# Altium PCB Lightproject.PcbDoc
Units mil, origin at the board's own origin, x right, y up, seen from the top; angles counter-clockwise.
Board outline 6000 x 4000 mil, 2 copper layers (Top Layer, Bottom Layer); 14 components, 6 nets, 54 pads, 0 vias.
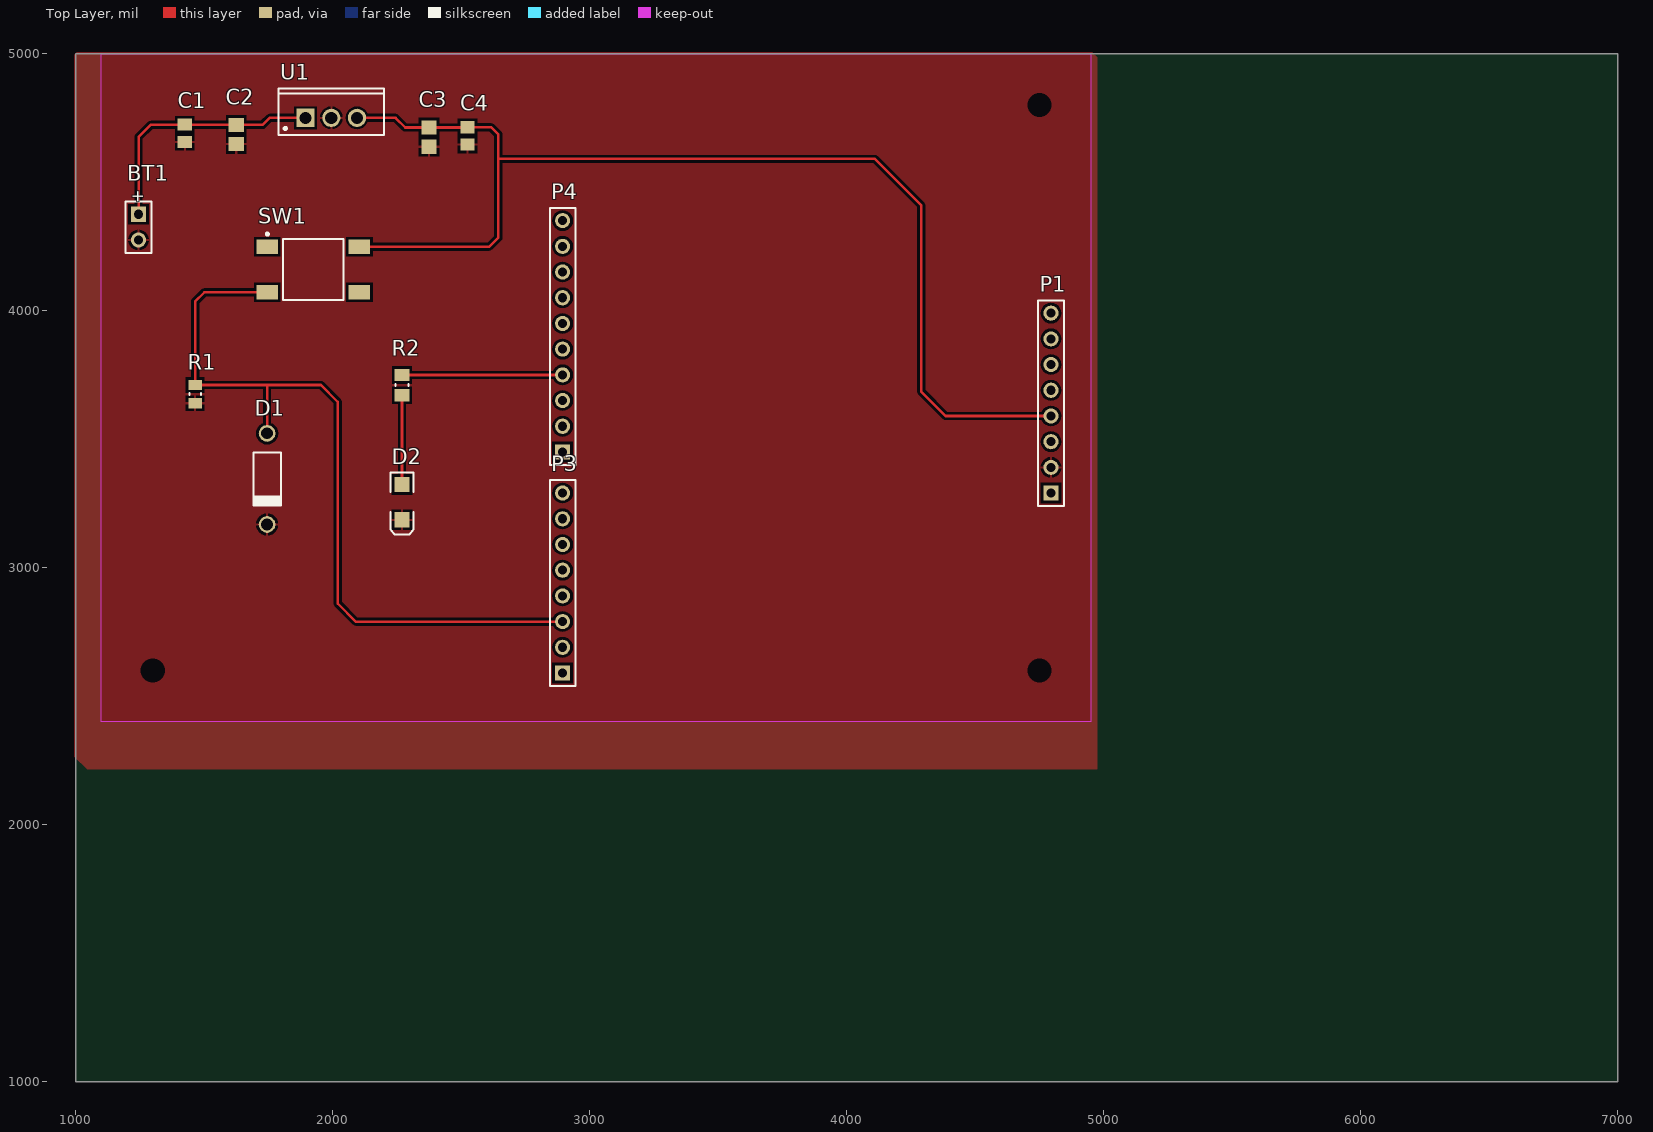
[diagram p0: Top Layer view]
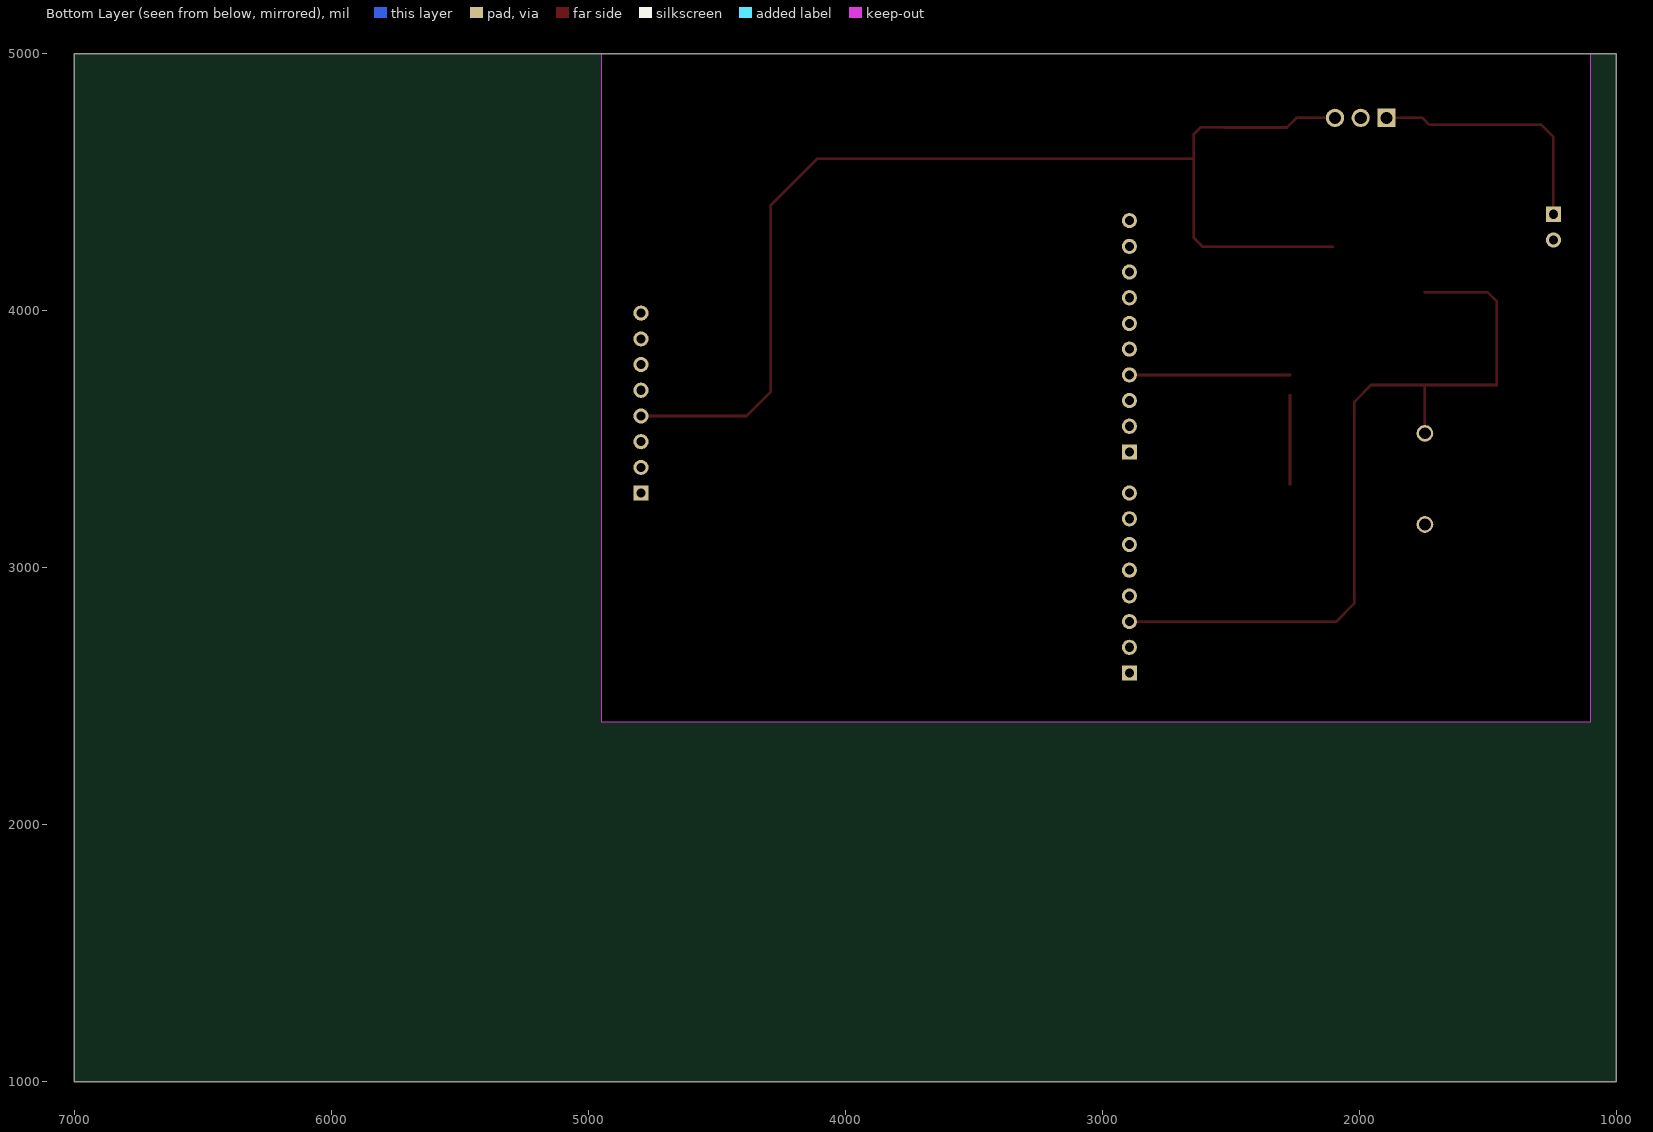
[diagram p1: Bottom Layer view, seen from below]

## Layer stack, top to bottom
Top Solder: solder mask 0.4, Solder Resist, Dk 3.5
Top Layer: signal copper 1.4
Dielectric 1: dielectric 12.6, FR-4, Dk 4.8
Bottom Layer: signal copper 1.4
Bottom Solder: solder mask 0.4, Solder Resist, Dk 3.5

## Board outline
1000,1000 7000,1000 7000,5000 1000,5000
cut-out: 1100,5000 4950,5000 4950,2400 1100,2400
cut-out: 1025,8130

## Design rules (kind name [scope] priority, off if disabled: settings)
Clearance [All] p1: gap=10 ignorepadtopadclearanceinfootprint=FALSE except(0: Arc-Hole Track-Hole SMDPad-Hole THPad-Hole Via-Hole Fill-Hole Poly-Hole Region-Hole Text-Hole)
PolygonConnect [All] p1: connectstyle=Relief reliefconductorwidth=10 reliefentries=4 polygonreliefangle="90 Angle" airgapwidth=10
RoomDefinition Lightproject [InComponentClass('Lightproject')] p1: confinementstyle=ConfineIn formatcopy=TRUE lockcomponents=FALSE outline 8480,1500 11435,1500 11435,2620 8480,2620
RoutingVias [All] p1: holewidth=28 width=50 viastyle="Through Hole" minholewidth=28 minwidth=50 maxholewidth=28 maxwidth=50
SolderMaskExpansion [All] p1: expansion=4
Width [All] p1: maxlimit=10 minlimit=10 preferedwidth=10
30 further rules are at their usual default settings.

## Classes and differential pairs
component class Lightproject: BT1 C1 C2 C3 C4 D1 D2 P1 P3 P4 R1 R2 SW1

## Components (designator, comment, footprint, x,y, rotation, side; value= is the part's Value field where it differs from the comment)
BT1 "Battery" BAT-2 1245,4325 r270 top
C1 "GRM21BR71A105KA01L" CAPC2013X135X45NL10T25 1425,4690 r90 top
C2 "GRM21BR71E104KA01L" CAPC2013X135X50ML10T20 1625,4685 r90 top
C3 "GRM21BR71E104KA01L" CAPC2013X135X50ML10T20 2375,4675 r90 top
C4 "GRM21BR71A105KA01L" CAPC2013X135X45NL10T25 2525,4680 r90 top
D1 "1N4730A" FAIR-DO-41-2_V 1745,3345 r270 top
D2 "LED2" 3.2X1.6X1.1 2270,3255 r270 top
P1 "Header 8" HDR1X8 4795,3290 r90 top
P3 "Header 8" HDR1X8 2895,2590 r90 top
P4 "Header 10" HDR1X10 2895,3450 r90 top
R1 "RC0805JR-07130KL" RESC2013X60X35NL10T20 1465,3675 r90 top
R2 "RC0805JR-07200RL" RESC2013X60X35ML10T20 2270,3710 r90 top
SW1 "FSM6JSMA" TECO-FSM6JSMA_V 1925,4160 r90 top
U1 "L7805CP" TO220FP 1995,4750 r0 top

## Footprints (in the part's own frame and the unit in brackets; to place one, negate y for a bottom-side part, rotate by r counter-clockwise, add the part's x,y. Pads: shape width x height; smd on the part's side, far side on the other; paste and mask are expansions set on the pad)
3.2X1.6X1.1 [mm] "SMT LED; 2 Flat Leads"
  rect 1.5x1.5 smd: 1(-1.75,0) 2(1.75,0)
  silkscreen extent -2.9,-1.15 3.2,1.15
BAT-2 [mm] "Battery; 2 Leads"
  rect 1.5x1.5 hole 0.9: 1(-1.27,0)
  round 1.5 hole 0.9: 2(1.27,0)
  silkscreen extent -2.54,-1.27 2.54,1.27
CAPC2013X135X45NL10T25 [mm] "Chip Capacitor, 2-Leads, Body 2.00x1.25mm, IPC Medium Density"
  rect 1.2x1.4 smd: 1(-0.85,0) 2(0.85,0)
  body extent -1.05,-0.67 1.05,0.67, height 1.35
CAPC2013X135X50ML10T20 [mm] "Chip Capacitor, 2-Leads, Body 2.00x1.25mm, IPC Low Density"
  rect 1.4x1.5 smd: 1(-0.95,0) 2(0.95,0)
  body extent -1.05,-0.67 1.05,0.67, height 1.35
FAIR-DO-41-2_V [mm] "2-Leads, Axial leaded, Body 2.72x5.2mm, Pin Spacing 9mm"
  round 1.65 hole 1.15: 1(-4.5,0) 2(4.5,0)
  silkscreen extent -2.6,-1.36 2.6,1.36, body extent -4.93,-1.36 4.93,1.36, height 2.71
HDR1X8 [mm] "Connector; Header; 8 Position"
  rect 1.5x1.5 hole 0.9: 1(0,0)
  round 1.5 hole 0.9: 2(2.54,0) 3(5.08,0) 4(7.62,0) 5(10.16,0) 6(12.7,0) 7(15.24,0) 8(17.78,0)
  silkscreen extent -1.27,-1.27 19.05,1.27
HDR1X10 [mm] "Connector; Header; 10 Position"
  rect 1.5x1.5 hole 0.9: 1(0,0)
  round 1.5 hole 0.9: 2(2.54,0) 3(5.08,0) 4(7.62,0) 5(10.16,0) 6(12.7,0) 7(15.24,0) 8(17.78,0) 9(20.32,0) 10(22.86,0)
  silkscreen extent -1.27,-1.27 24.13,1.27
RESC2013X60X35ML10T20 [mm] "Chip Resistor, 2-Leads, Body 2.00x1.25mm, IPC Low Density"
  rect 1.2x1.45 smd: 1(-1,0) 2(1,0)
  silkscreen extent -0.1,-0.63 0.1,0.63, body extent -1.05,-0.67 1.05,0.67, height 0.6
RESC2013X60X35NL10T20 [mm] "Chip Resistor, 2-Leads, Body 2.00x1.25mm, IPC Medium Density"
  rect 1x1.35 smd: 1(-0.9,0) 2(0.9,0)
  silkscreen extent -0.1,-0.58 0.1,0.58, body extent -1.05,-0.67 1.05,0.67, height 0.6
TECO-FSM6JSMA_V [mm] "SMD, 4-Leads, Body 6x6mm, Pitch 4.5mm"
  rect 1.4x2.1 smd: 1(2.25,4.55) 2(2.25,-4.55) 3(-2.25,4.55) 4(-2.25,-4.55)
  silkscreen extent -3,-3 3.62,4.67, body extent -3,-5 3,5, height 7.11
TO220FP [mm] "TO, Thru-Hole, Vertical, Heatsink Mounted; 3 In-Line Leads; Pitch 2.54 mm"
  rect 1.8x1.8 hole 1.2: 1(-2.54,0)
  round 1.8 hole 1.2: 2(0,0) 3(2.54,0)
  silkscreen extent -5.2,-1.7 5.2,2.9, body extent -5.25,-1.75 5.25,2.95, height 20

## Part data
BT1: "Multicell Battery", LatestRevisionDate=17-Jul-2002, LatestRevisionNote="Re-released for DXP Platform.", PackageDescription="Battery; 2 Leads", PackageReference=BAT-2, Published=24-Mar-1999, Publisher="Altium Limited"
C1 C4: library part CMP-2007-03551-1, Manufacturer=Murata, Part Number=GRM21BR71A105KA01L
C2 C3: library part CMP-2007-03456-1, Manufacturer=Murata, Part Number=GRM21BR71E104KA01L
D1: library part CMP-0892-00029-1, "Zener Diode, 3.9V, 1W, 5%, -65 to 200 degC, 2-Pin DO-41, Body 2.72 x 5.2 mm, RoHS", Manufacturer="Fairchild Semiconductor", Operating and Storage Temperature Range="-65 to 200 degC", Test Current IZ (mA)=64, Tolerance=5%, ComponentLink1Description="Manufacturer URL", ComponentLink1URL=http://www.fairchildsemi.com/, ComponentLink2Description=Datasheet, ComponentLink2URL=http://www.fairchildsemi.com/ds/1N/1N4744A.pdf, ComponentLink3Description="Package Specification", ComponentLink3URL=http://www.fairchildsemi.com/dwg/DO/DO41A.pdf, DatasheetVersion="Rev. H3", IR (uA)=50, Mounting Technology="Through Hole", PackageDescription="2-Pin Axial leaded, Body 2.72 x 5.2 mm, Lead Spread 25.4 mm", PackageReference=DO-41-2, PackageVersion="Rev. 2", PartNumber=1N4730A, PD (W)=1, RoHS=TRUE, VZ (Max.) (V)=4.095, VZ (Min.) (V)=3.705, ZZ (Max) (ohm)=9
D2: "Typical RED, GREEN, YELLOW, AMBER GaAs LED", LatestRevisionDate=17-Jul-2002, LatestRevisionNote="Re-released for DXP Platform.", PackageDescription="SM LED; 2 Flat Leads", PackageReference=3.2X1.6X1.1, PackageVersion=Feb-2002, Published=8-Jun-2000, Publisher="Altium Limited"
P1 P3: "Header, 8-Pin", LatestRevisionDate=17-Jul-2002, LatestRevisionNote="Re-released for DXP Platform.", Publisher="Altium Limited"
P4: "Header, 10-Pin", LatestRevisionDate=17-Jul-2002, LatestRevisionNote="Re-released for DXP Platform.", Publisher="Altium Limited"
R1: library part CMP-2001-01344-1, Manufacturer=Yageo, Part Number=RC0805JR-07130KL
R2: library part CMP-2001-01354-1, Manufacturer=Yageo, Part Number=RC0805JR-07200RL
SW1: library part CMP-2000-07503-1, "Switch, SPST, 24 V, -35 to 85 degC, 4-Pin SMD, RoHS, Tape and Reel", Case\/Package=SMD/SMT, Contact Current Rating=50mA, Contact Resistance=100mOhm, Insulation Resistance=100MOhm, Manufacturer="TE Connectivity", Max Operating Temperature=85degC, Max Voltage Rating (DC)=12V, Min Operating Temperature=-35degC, Operating Force=1.57N, Package Description="4-Pin Surface Mount Device, Body 6 x 6 mm, Pitch 4.5 mm", Package Quantity=750, Voltage Rating=24V, Actuator Length=3.4mm, Actuator Material=Polyamide, Contact Material=CopperAlloy, Contact Plating=Silver, Current Rating=50mA, Datasheet URL=http://www.te.com/commerce/DocumentDelivery/DDEController?Action=showdoc&DocId=Customer+Drawing%7F2-1437565-7%7FV%7Fpdf%7FEnglish%7FENG_CD_2-1437565-7_V.pdf%7F4-1437565-9, Datasheet Version="Rev. V, 02/2015", Electrical Life=100000Cycles, ELV=Compliant, Illumination Type=Illuminated, Lead Free=LeadFree, Length=6mm, Manufacturer URL=http://www.te.com/, Mechanical Life=100000Cycles, Mount=SurfaceMount, Mounting Technology=SurfaceMount, Orientation=Straight, Package Reference=FSM6JSMA, Packaging=LoosePiece, REACH SVHC=Unknown, RoHSCompliant=true, Switch Travel=0.25mm, Termination=GullWing, Throw Configuration=SPST, Voltage Rating (DC)=24V, Width=6mm
U1: library part CMP-0244-00474-1, "Positive Voltage Regulator, 5V, 3-Pin TO-220FP", ComponentLink1Description="Manufacturer URL", ComponentLink1URL=http://www.st.com, ComponentLink2Description=Datasheet, ComponentLink2URL=http://www.st.com/internet/com/TECHNICAL_RESOURCES/TECHNICAL_LITERATURE/DATASHEET/CD00000444.pdf, DatasheetVersion=16/11/2011, PackageDescription="TO, Thru-Hole, Vertical, Heatsink Mounted; 3 In-Line Leads; Pitch 2.54 mm", PackageReference=TO220FP, PackageVersion=2011

## Free pads (board coordinates)
  round 30 / inner round 60 / far side round 30 hole 94: 1(4750,4800) 2(4750,2600)
  round 30 hole 94: 3(1300,2600)

## Nets (pads, with @x,y where several pads share a name; then routed paths per layer and width w, separated by ;. In a path a pad name is that pad's centre, name@x,y a point inside that pad or via, vN(x,y) a via of type N, cw(c..) or ccw(c..) an arc to the next point about the centre after c; other vN are vias at no path point)
GND: BT1.2 C1.1 C2.1 C3.1 C4.1 D1.2 D2.2 P1.2 pad.1 pad.2 pad.3 R1.1 U1.2
NetBT1_1: BT1.1 C1.2 C2.2 U1.1 | length 981.9
  Top Layer w10: BT1.1 1245,4675 1293.46,4723.46 C1.2 1623.94,4723.46 C2.2 1727.4,4722.4 1755,4750 U1.1
NetC3_2: C3.2 C4.2 P1.4 SW1.2 U1.3 | length 4523.5
  Top Layer w10: U1.3 2245,4750 2282.6,4712.4 C3.2 2523.94,4712.4 C4.2 2616.54,4713.46 2645,4685 2645,4590 ; SW1.2 2610,4248.58 2645,4283.58 2645,4590 ; P1.4 4385,3590 4290,3685 4290,4410 4110,4590 2645,4590
NetD1_1: D1.1 P3.3 R1.2 SW1.3 | length 3079.9
  Top Layer w10: D1.1 1745,3710.43 ; SW1.3 1501.42,4071.42 1465,4035 R1.2 1745,3710.43 ; P3.3 2090,2790 2020,2860 2020,3645 1954.57,3710.43 1745,3710.43
NetD2_1: D2.1 R2.1 | length 346.7
  Top Layer w10: D2.1 R2.1
NetP4_4: P4.4 R2.2 | length 625.3
  Top Layer w10: R2.2 2894.37,3749.37 P4.4
pads on no net: P1.1 P1.3 P1.5 P1.6 P1.7 P1.8 P3.1 P3.2 P3.4 P3.5 P3.6 P3.7 P3.8 P4.1 P4.2 P4.3 P4.5 P4.6 P4.7 P4.8 P4.9 P4.10 SW1.1 SW1.4

## Polygon pours and split planes (outlines as drawn)
GND on Top Layer "Ground" (solid, pour order 12): 995,4995 1005,5005 4955,5005 4975,4985 4975,2215 1045,2215 995,2265

## Silkscreen, mask and mechanical layers (free items; w line width, h text height)
Top Paste:
  text "Light Project v1 Elise Fernandez" at 1135,2430 h60

## Dimensions
2895,3450 to 4795,3290 on Mechanical 1
2895,4050 to 4795,3990 on Mechanical 1
2895,4350 to 2895,2590 on Mechanical 1

## Text inside footprints (layer, text, board x,y; h text height)
BT1: Top Overlay "+" at 1222.28,4469.49 h45.28 r270